# EAGLE board main_board__INC (EAGLE 7.7.0)

Size 63.17 x 38.09 mm. Coordinates in mm from the lower left corner, seen from the top.
Outline: 0,0 63.17,0 63.17,38.09 0,38.09 0,0
Copper layers (1*16): Top 0.035mm / dielectric 1.5mm / Bottom 0.035mm
Design rules "default": minimum track width 10mil, minimum drill 24mil, track to track 8mil, track to pad 8mil, pad to pad 8mil, via to via 8mil, smd to smd 8mil, copper to edge 40mil, drill to drill 8mil, minimum pad ring 10mil, minimum via ring 8mil, stop-mask expansion 4mil, vias tented up to drill 0mil, thermal gap 10mil

## Footprints (pad centres in the part's own frame; a part is rotated, then mirrored left to right if it is on the bottom)
1X02 = drill 1.016 pad 1.88: 1 0,0; 2 2.54,0
SOT23-5 = smd 0.55 x 1.2: 1 -0.95,-1.3; 2 0,-1.3; 3 0.95,-1.3; 4 0.95,1.3; 5 -0.95,1.3
0603-CAP = smd 1.1 x 1: 1 -0.85,0; 2 0.85,0
0402-CAP = smd 0.7 x 0.9: 1 -0.65,0; 2 0.65,0
SMA-DIODE = smd 1.27 x 1.47: A -2.15,0; C 2.15,0
TQFP32-08 = smd 1.27 x 0.559: 1 -4.293,2.8; 2 -4.293,2; 3 -4.293,1.2; 4 -4.293,0.4; 5 -4.293,-0.4; 6 -4.293,-1.2; 7 -4.293,-2; 8 -4.293,-2.8; 17 4.293,-2.8; 18 4.293,-2; 19 4.293,-1.2; 20 4.293,-0.4; 21 4.293,0.4; 22 4.293,1.2; 23 4.293,2; 24 4.293,2.8 | smd 0.559 x 1.27: 9 -2.8,-4.293; 10 -2,-4.293; 11 -1.2,-4.293; 12 -0.4,-4.293; 13 0.4,-4.293; 14 1.2,-4.293; 15 2,-4.293; 16 2.8,-4.293; 25 2.8,4.293; 26 2,4.293; 27 1.2,4.293; 28 0.4,4.293; 29 -0.4,4.293; 30 -1.2,4.293; 31 -2,4.293; 32 -2.8,4.293
USB-MICROB = smd 0.35 x 1.4: D+ 0,2.65; D- -0.65,2.65; GND 1.3,2.65; ID 0.65,2.65; VBUS -1.3,2.65 | smd 1.8 x 1.9: MT1 -4,0; MT2 4,0 | smd 1.9 x 1.9: P$1 -1.27,0; P$2 1.27,0
1X04 = drill 1.016 pad 1.88 square: 1 0,0 | drill 1.016 pad 1.88: 2 2.54,0; 3 5.08,0; 4 7.62,0
1X05 = drill 1.016 pad 1.88: 1 0,0; 2 2.54,0; 3 5.08,0; 4 7.62,0; 5 10.16,0
1X03 = drill 1.016 pad 1.88: 1 0,0; 2 2.54,0; 3 5.08,0
JST-2-SMD = smd 1 x 4.6: 1 -1,-3.7; 2 1,-3.7 | smd 1.6 x 3.4: NC1 -3.4,1.5; NC2 3.4,1.5
LED-0603 = smd 0.8 x 0.8: A 0,-0.75; C 0,0.75
0603-RES = smd 1.1 x 1: 1 -0.85,0; 2 0.85,0
0402-RES = smd 0.7 x 0.9: 1 -0.65,0; 2 0.65,0
TQFP44 = smd 1.5 x 0.5: 1 -5.8,4; 2 -5.8,3.2; 3 -5.8,2.4; 4 -5.8,1.6; 5 -5.8,0.8; 6 -5.8,0; 7 -5.8,-0.8; 8 -5.8,-1.6; 9 -5.8,-2.4; 10 -5.8,-3.2; 11 -5.8,-4; 23 5.8,-4; 24 5.8,-3.2; 25 5.8,-2.4; 26 5.8,-1.6; 27 5.8,-0.8; 28 5.8,0; 29 5.8,0.8; 30 5.8,1.6; 31 5.8,2.4; 32 5.8,3.2; 33 5.8,4 | smd 0.5 x 1.5: 12 -4,-5.8; 13 -3.2,-5.8; 14 -2.4,-5.8; 15 -1.6,-5.8; 16 -0.8,-5.8; 17 0,-5.8; 18 0.8,-5.8; 19 1.6,-5.8; 20 2.4,-5.8; 21 3.2,-5.8; 22 4,-5.8; 34 4,5.8; 35 3.2,5.8; 36 2.4,5.8; 37 1.6,5.8; 38 0.8,5.8; 39 0,5.8; 40 -0.8,5.8; 41 -1.6,5.8; 42 -2.4,5.8; 43 -3.2,5.8; 44 -4,5.8
LP2985 = smd 0.55 x 1.2: 1 0.32,-0.03; 2 1.27,-0.03; 3 2.22,-0.03; 4 2.22,2.57; 5 0.32,2.57
CRYSTAL-SMD-5X3 = smd 1.9 x 1.1: 1 -1.85,-1.15; 2 1.85,-1.15; 3 1.85,1.15; 4 -1.85,1.15

## Placement (x,y rotation side)
+OUT-  [1X02]  -17.78,11.43 0 top  (outside the outline)
BC1  MCP73831  [SOT23-5]  -15.24,17.78 0 top  (outside the outline)
C1  18p  [0603-CAP]  -12.7,-66.04 0 top  (outside the outline)
C2  18p  [0603-CAP]  -6.35,-66.04 0 top  (outside the outline)
C3  100n  [0603-CAP]  -36.83,-24.13 0 top  (outside the outline)
C4  18p  [0603-CAP]  -53.34,-96.52 0 top  (outside the outline)
C5  18p  [0603-CAP]  -53.34,-100.33 0 top  (outside the outline)
C6  100n  [0603-CAP]  -36.83,-80.01 0 top  (outside the outline)
C7  100n  [0603-CAP]  -30.48,-80.01 0 top  (outside the outline)
C8  100n  [0603-CAP]  -24.13,-80.01 0 top  (outside the outline)
C9  1uF  [0603-CAP]  -17.78,-80.01 0 top  (outside the outline)
C10  1uF  [0603-CAP]  -30.48,17.78 0 top  (outside the outline)
C11  2.2uF  [0603-CAP]  -15.24,22.86 0 top  (outside the outline)
C12  4.7uF  [0402-CAP]  -19.05,22.86 0 top  (outside the outline)
C13  4.7uF  [0402-CAP]  -22.86,22.86 0 top  (outside the outline)
C14  10nF (OPT)  [0603-CAP]  -26.67,17.78 0 top  (outside the outline)
C15  100n  [0603-CAP]  -53.34,-104.14 0 top  (outside the outline)
DS1  MBRA140  [SMA-DIODE]  -20.32,16.51 0 top  (outside the outline)
IC1  MEGA8-AI  [TQFP32-08]  -33.02,-71.12 0 top  (outside the outline)
JMP  [1X02]  -24.13,11.43 0 top  (outside the outline)
JP1  USB-MICROB  [USB-MICROB]  -50.8,-110.49 0 top  (outside the outline)
JP2  [1X02]  -30.48,11.43 0 top  (outside the outline)
JP3  [1X04]  -30.48,-54.61 0 top  (outside the outline)
JP4  [1X05]  -30.48,-35.56 0 top  (outside the outline)
JP6  [1X03]  -30.48,-12.7 0 top  (outside the outline)
JP7  LiPo Battery  [JST-2-SMD]  -17.78,6.35 0 top  (outside the outline)
LG1  GREEN  [LED-0603]  -19.05,26.67 0 top  (outside the outline)
LR1  RED  [LED-0603]  -22.86,26.67 0 top  (outside the outline)
R1  33.2k  [0603-RES]  -30.48,-24.13 0 top  (outside the outline)
R2  14k  [0603-RES]  -24.13,-24.13 0 top  (outside the outline)
R3  2K  [0402-RES]  -26.67,22.86 0 top  (outside the outline)
R4  330  [0402-RES]  -30.48,22.86 0 top  (outside the outline)
R5  330  [0402-RES]  -15.24,26.67 0 top  (outside the outline)
R6  22  [0603-RES]  -53.34,-83.82 0 top  (outside the outline)
R7  22  [0603-RES]  -53.34,-87.63 0 top  (outside the outline)
U$1  ATMEGA32U4-AU  [TQFP44]  -48.26,-71.12 0 top  (outside the outline)
VR1  LP2985  [LP2985]  -25.4,1.27 0 top  (outside the outline)
Y1  [CRYSTAL-SMD-5X3]  -21.59,-67.31 0 top  (outside the outline)
Y2  [CRYSTAL-SMD-5X3]  -50.8,-92.71 0 top  (outside the outline)

## Library data of the parts
+OUT- JP2-JP4 JP6 = SparkFun-Connectors
BC1 C1-C9 C12 C13 C15 JMP JP7 LG1 LR1 R3-R5 Y1 Y2 = SparkFun
C10 C11 C14 = SparkFun-Passives
DS1 = SparkFun-DiscreteSemi; PROD_ID: DIO-08053
IC1 = atmel; MPN: ATMEGA8-16AU; OC_FARNELL: 9171371; OC_NEWARK: 73M8863
JP1 = SparkFun-Connectors; PROD_ID: CONN-09505
R1 R2 R6 R7 = SparkFun-Resistors
U$1 = adafruit
VR1 = awqua_eagle_library

## Nets
AIN0: IC1.23
AREF: C7.1 IC1.20
BTN1: IC1.2 JP3.4
BTN2: IC1.9 JP3.3
BTN3: IC1.10 JP3.2
CS: IC1.14
D+: JP1.D+ R7.2
D-: JP1.D- R6.2
GND: +OUT-.2 BC1.2 C1.1 C2.1 C3.1 C4.1 C5.1 C6.2 C7.2 C8.2 C9.2 C10.2 C11.2 C12.2 C13.2 C14.2 C15.2 IC1.3 IC1.5 IC1.21 JMP.1 JP1.GND JP1.MT1 JP1.MT2 JP2.1 JP3.1 JP4.2 JP6.1 JP7.1 LG1.C R2.1 R3.2 U$1.15 U$1.23 U$1.35 U$1.43 VR1.2
INT2: IC1.32
LED1: IC1.11
LED2: IC1.12
LED3: IC1.13
MISO: IC1.16
MOSI: IC1.15
N$1: C14.1 VR1.4
N$2: LG1.A R5.2
N$3: LR1.A R4.1
N$4: +OUT-.1 C11.1 VR1.5
N$5: DS1.A JP2.2
N$6: U$1.41
N$7: U$1.40
N$8: U$1.39
N$9: U$1.38
N$10: U$1.37
N$11: U$1.36
N$12: U$1.33
N$13: U$1.1
N$14: U$1.31
N$15: U$1.32
N$16: U$1.12
N$17: U$1.30
N$18: U$1.29
N$19: U$1.28
N$20: U$1.11
N$21: U$1.10
N$22: U$1.9
N$23: U$1.8
N$24: U$1.27
N$25: U$1.26
N$26: U$1.22
N$27: U$1.25
N$28: U$1.21
N$29: U$1.20
N$30: U$1.19
N$31: U$1.18
N$32: U$1.13
N$34: U$1.14
N$36: U$1.5
N$37: U$1.34
N$38: U$1.2
N$39: U$1.24
N$40: U$1.44
N$41: R6.1 U$1.3
N$42: R7.1 U$1.4
N$43: U$1.6
N$44: C15.1 U$1.42
N$45: C4.2 U$1.17 Y2.3
N$46: C5.2 U$1.16 Y2.1
PC3: IC1.26
PD3: IC1.1
PROG: BC1.5 R3.1
Q1: C2.2 IC1.8 Y1.1
Q2: C1.2 IC1.7 Y1.3
RST: IC1.29 JP4.5
RX: IC1.30 JP4.3
SCK: IC1.17
SCL: IC1.28
SDA: IC1.27
STAT: BC1.1 LR1.C R5.1
TEMP: IC1.24 JP6.2
TX: IC1.31 JP4.4
VBUS: JP1.VBUS U$1.7
VCC: BC1.3 C3.2 C6.1 C8.1 C9.1 C10.1 C13.1 IC1.4 IC1.6 IC1.18 JMP.2 JP4.1 JP6.3 JP7.2 R1.1 VR1.1 VR1.3
VIN: BC1.4 C12.1 DS1.C R4.2
VOLT: IC1.25 R1.2 R2.2

## Tracks (layer width: path | path; a pad name or v marks a point on that pad's centre or on a via)
AREF  (1 unrouted)
BTN1  (1 unrouted)
BTN2  (1 unrouted)
BTN3  (1 unrouted)
D+  (1 unrouted)
D-  (1 unrouted)
GND  (36 unrouted)
N$1  (1 unrouted)
N$2  (1 unrouted)
N$3  (1 unrouted)
N$4  (2 unrouted)
N$5  (1 unrouted)
N$41  (1 unrouted)
N$42  (1 unrouted)
N$44  (1 unrouted)
N$45  (2 unrouted)
N$46  (2 unrouted)
PROG  (1 unrouted)
Q1  (2 unrouted)
Q2  (2 unrouted)
RST  (1 unrouted)
RX  (1 unrouted)
STAT  (2 unrouted)
TEMP  (1 unrouted)
TX  (1 unrouted)
VBUS  (1 unrouted)
VCC  (16 unrouted)
VIN  (3 unrouted)
VOLT  (2 unrouted)